# EAGLE board PCB (EAGLE 9.7.0)
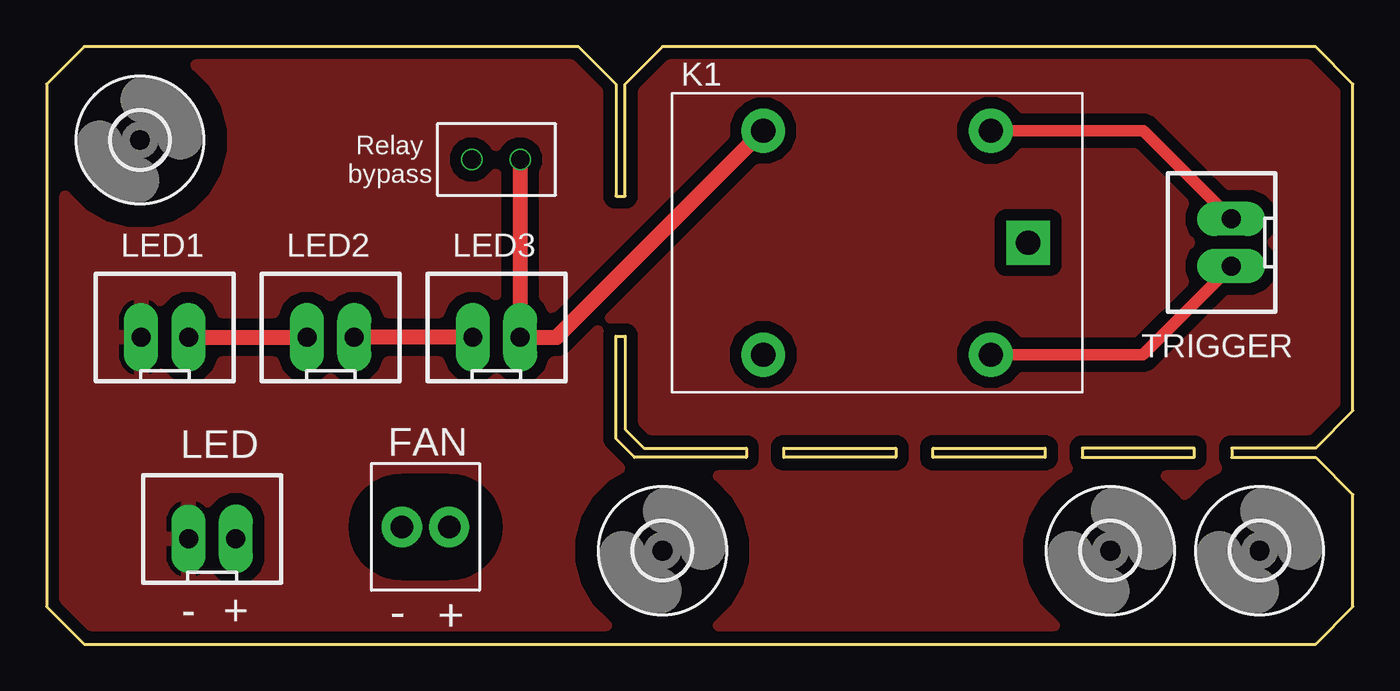
[diagram p0: board, top side]
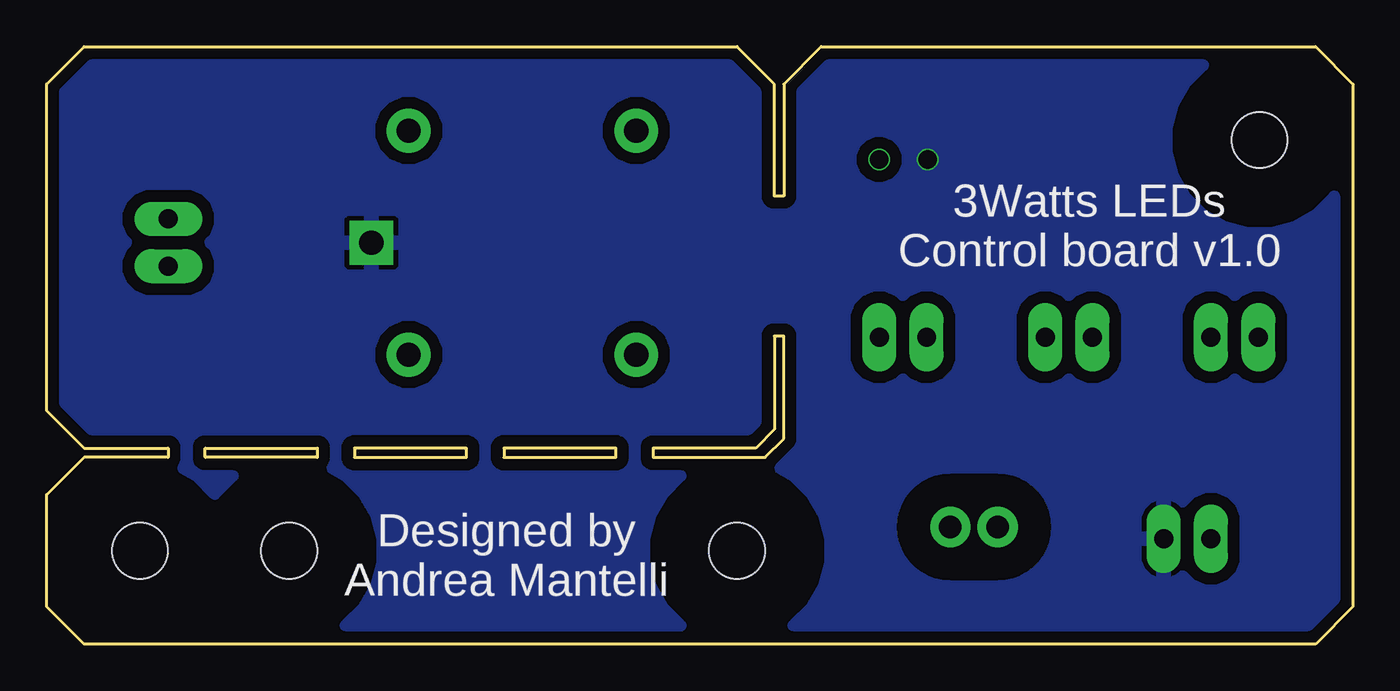
[diagram p1: board, bottom side, seen from below]

Size 70 x 32 mm. Coordinates in mm from the lower left corner, seen from the top.
Outline: 2,0 68,0 70,2 70,8 68,10 63.5,10 63.5,10.5 68,10.5 70,12.5 70,30 68,32 33,32 31,30 31,24 30.5,24 30.5,30 28.5,32 2,32 0,30 0,2 2,0
Outline: 53.5,10 47.5,10 47.5,10.5 53.5,10.5 53.5,10
Outline: 45.5,10 39.5,10 39.5,10.5 45.5,10.5 45.5,10
Outline: 30.5,16.5 31,16.5 31,11.5 32,10.5 37.5,10.5 37.5,10 31.5,10 30.5,11 30.5,16.5
Outline: 55.5,10.5 55.5,10 61.5,10 61.5,10.5 55.5,10.5
Copper layers (1*16): Top 0.035mm / dielectric 1.6mm / Bottom 0.035mm
Design rules "jlcpcb-2layers": minimum track width 5mil, minimum drill 0.3mm, track to track 5mil, track to pad 5mil, pad to pad 5mil, via to via 5mil, smd to smd 5mil, copper to edge 0.2mm, drill to drill 6mil, minimum pad ring 10mil, minimum via ring 3mil, stop-mask expansion 4mil, vias tented up to drill 0mil, thermal gap 10mil

## Footprints (pad centres in the part's own frame; a part is rotated, then mirrored left to right if it is on the bottom)
TERMBLK_254-2N = drill 1.2: 1 0,0; 2 2.54,0
3,0 = hole 3: 0,0
JSM1-12V-5 = drill 1.3 pad 2 square: 1 8.1,0 | drill 1.3 pad 2: 2 6.1,6; 3 -6.1,6; 4 -6.1,-6; 5 6.1,-6
JST-XH-02-PACKAGE-LONG-PAD = drill 1.016 long: 1 -1.27,0; 2 1.27,0

## Placement (x,y rotation side)
FAN  2828XX-2282834-2  [TERMBLK_254-2N]  19.03,6.27 0 top
H1  MOUNT-HOLE3.0  [3,0]  33,5 0 top
H2  MOUNT-HOLE3.0  [3,0]  57,5 0 top
H3  MOUNT-HOLE3.0  [3,0]  65,5 0 top
H4  MOUNT-HOLE3.0  [3,0]  5,27 0 top
K1  JSM1-12V-5  [JSM1-12V-5]  44.5,21.5 0 top
LED  JST-XH-02-PIN-LONG-PAD  [JST-XH-02-PACKAGE-LONG-PAD]  8.87,5.63 0 top
LED1  JST-XH-02-PIN-LONG-PAD  [JST-XH-02-PACKAGE-LONG-PAD]  6.33,16.43 0 top
LED2  JST-XH-02-PIN-LONG-PAD  [JST-XH-02-PACKAGE-LONG-PAD]  15.22,16.43 0 top
LED3  JST-XH-02-PIN-LONG-PAD  [JST-XH-02-PACKAGE-LONG-PAD]  24.11,16.43 0 top
TRIGGER  JST-XH-02-PIN-LONG-PAD  [JST-XH-02-PACKAGE-LONG-PAD]  63.48,21.51 90 top

## Library data of the parts
FAN = Connector; GND: -; VCC: +
H1-H4 = holes
K1 = Relay; CREATED_BY: PCBLayout.com; DIGIKEY_PARTNO: 255-1240-ND; MANUFACTURER: Panasonic Electric Works; MPN: JSM1-12V-5
LED = Rembrandt Electronics - JST XH Connectors v1-0; GND: -; VCC: +
LED1-LED3 = Rembrandt Electronics - JST XH Connectors v1-0
TRIGGER = Rembrandt Electronics - JST XH Connectors v1-0; TRIGGER: 1

## Nets
-12V: FAN.2
GND1: LED1.1 LED.1
GND2: FAN.1
N$1: LED1.2 LED2.1
N$2: K1.2 TRIGGER.2
N$3: K1.3 LED3.2
N$4: K1.5 TRIGGER.1
N$6: LED2.2 LED3.1
VCC: K1.1 LED.2

## Tracks (layer width: path | path; a pad name or v marks a point on that pad's centre or on a via)
GND1
  pour Top (isolate 0.61): 0,30 0,2 2,0 68,0 70,2 70,8 68,10 68,10.5 70,12.5 70,30 68,32 33,32 31,30 30.5,30 28.5,32 2,32
N$1
  Top 0.813: LED1.2 LED2.1
N$2
  Top 0.61: K1.2 58.76,27.5 TRIGGER.2
N$3  (via drill 1)
  Top 0.813: 25.06,16.75 LED3.2 | v25.38,25.95 LED3.2 | LED3.2 27.33,16.43 K1.3
N$4
  Top 0.61: K1.5 58.74,15.5 TRIGGER.1
N$6
  Top 0.813: LED2.2 LED3.1 22.52,16.75
VCC  (via drill 1)
  other vias: 22.78,25.95
  pour Bottom (isolate 0.61): 0,30 0,2 2,0 68,0 70,2 70,8 68,10 68,10.5 70,12.5 70,30 68,32 33,32 31,30 30.5,30 28.5,32 2,32
(copper drawn outside any net)
  shapes: Bottom area x1, Top area x1

## Text on the board
tNames: Relay / bypass
bNames: 3Watts LEDs / Control board v1.0 | Designed by / Andrea Mantelli